# Altium PCB RN2483_carrier_board_pcb.PcbDoc
Units mm, origin at the board's own origin, x right, y up, seen from the top; angles counter-clockwise.
Board outline 29.21 x 43.94 mm, 2 copper layers (Top Layer, Bottom Layer); 5 components, 26 nets, 87 pads, 159 vias.
Unrouted connection lines stored in the file: 2.
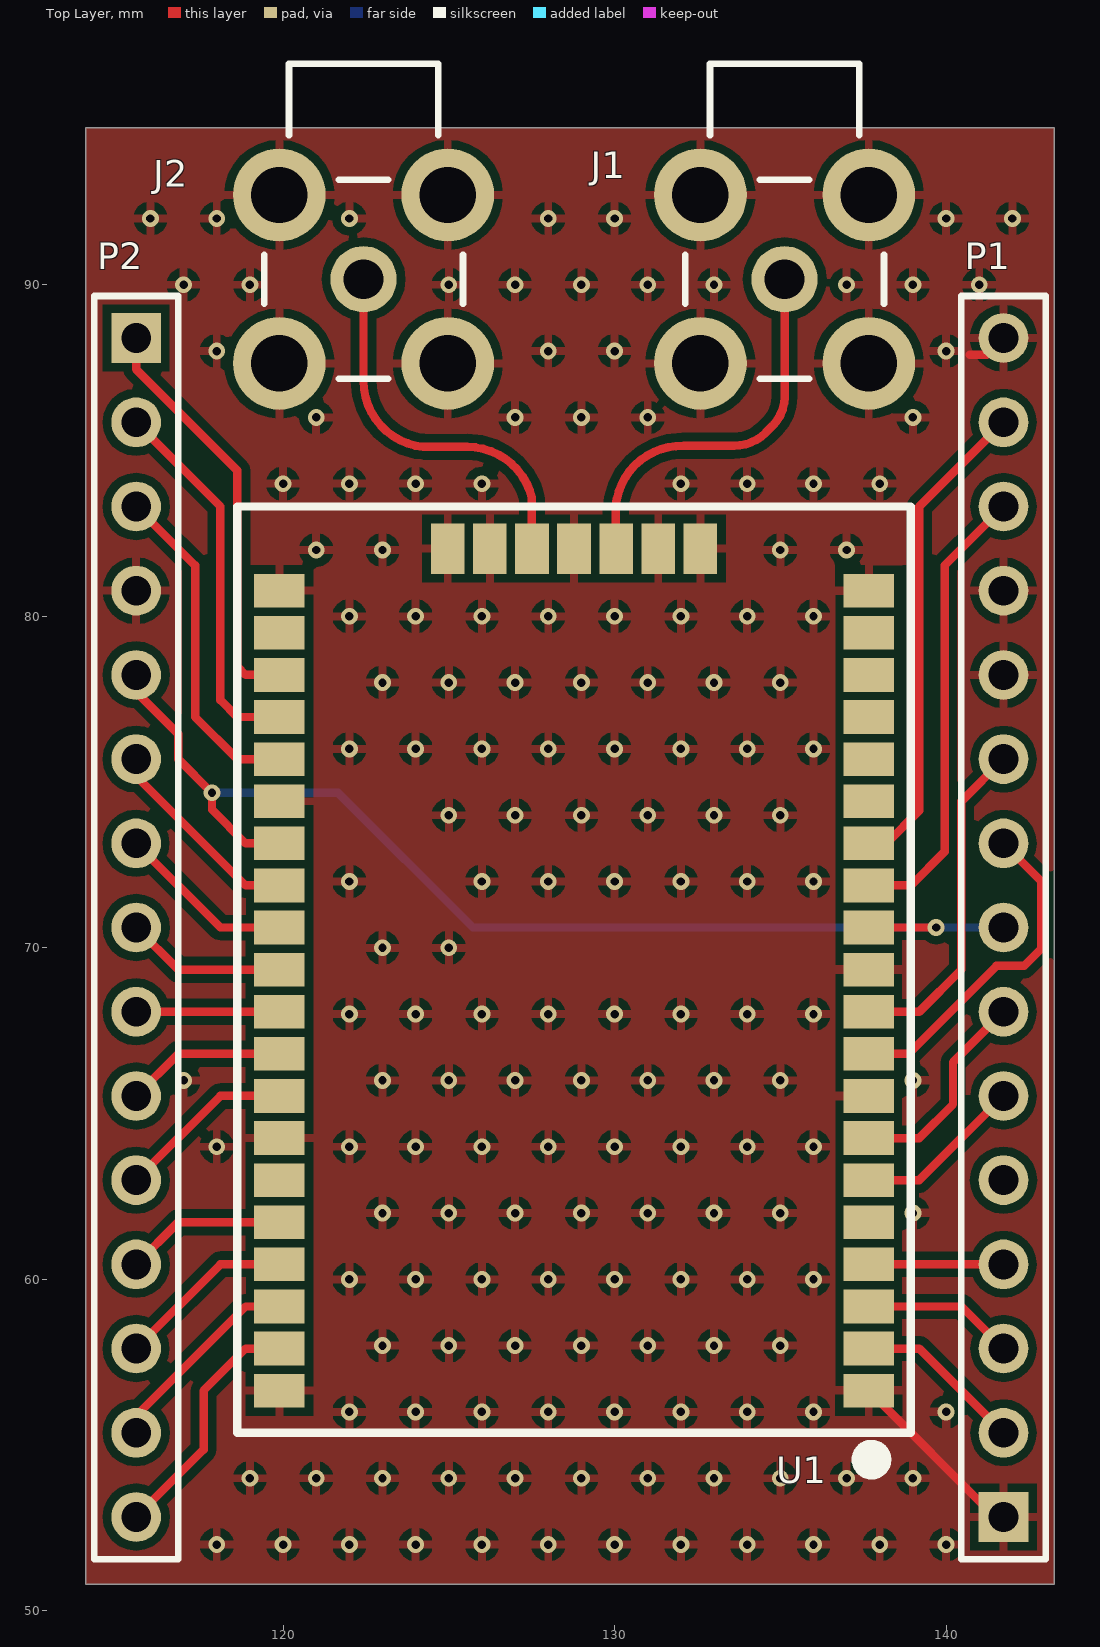
[diagram p0: Top Layer view]
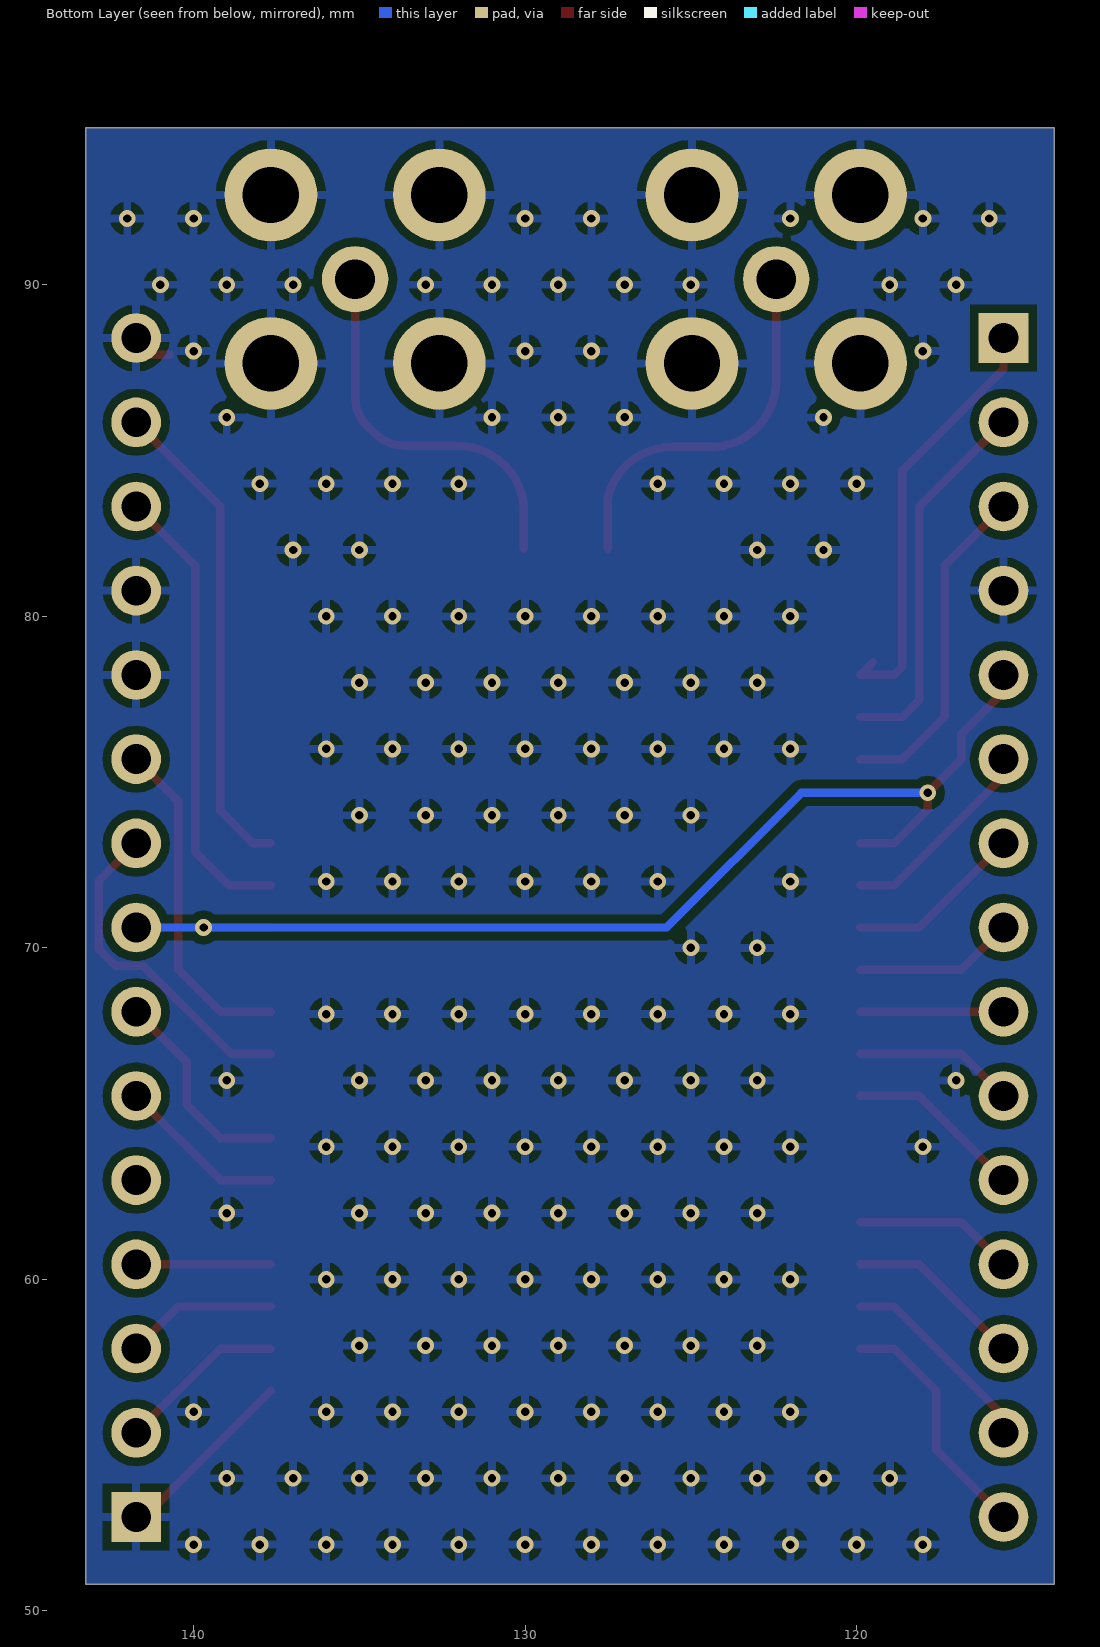
[diagram p1: Bottom Layer view, seen from below]

## Layer stack, top to bottom
Top Solder: solder mask 0.0102, Solder Resist, Dk 3.5
Top Layer: signal copper 0.0356
Dielectric 1: dielectric 0.32, FR-4, Dk 4.8
Bottom Layer: signal copper 0.0356
Bottom Solder: solder mask 0.0102, Solder Resist, Dk 3.5

## Board outline
114.046,50.8 143.256,50.8 143.256,94.742 114.046,94.742

## Design rules (kind name [scope] priority, off if disabled: settings)
Clearance [All] p1: gap=0.254
PolygonConnect [All] p1: connectstyle=Relief reliefconductorwidth=0.254 reliefentries=4 polygonreliefangle="90 Angle" airgapwidth=0.254
RoutingVias [All] p1: holewidth=0.254 width=0.508 viastyle="Through Hole" minholewidth=0.254 minwidth=0.508 maxholewidth=0.711 maxwidth=1.27
SolderMaskExpansion [All] p1: expansion=0.102 soldermaskfromhole=TRUE
Width [All] p1: maxlimit=0.254 minlimit=0.254 preferedwidth=0.254
30 further rules are at their usual default settings.

## Classes and differential pairs
component class RN2483: U1
component class Connectors: 434Mhz J1 P1 P2

## Components (designator, comment, footprint, x,y, rotation, side; value= is the part's Value field where it differs from the comment)
J1 "COAX-F" MCX5.08-H5 135.128,90.17 r270 top
J2 "COAX-F" MCX5.08-H5 122.428,90.17 r270 top
P1 "Header 15" HDR1X15 141.732,52.832 r90 top
P2 "Header 15" HDR1X15 115.57,88.392 r270 top
U1 "RN2483" RN2483 118.649,55.361 r0 top

## Footprints (in the part's own frame and the unit in brackets; to place one, negate y for a bottom-side part, rotate by r counter-clockwise, add the part's x,y. Pads: shape width x height; smd on the part's side, far side on the other; paste and mask are expansions set on the pad)
HDR1X15 [mm] "Connector; Header; 15 Position"
  rect 1.5x1.5 hole 0.9: 1(0,0)
  round 1.5 hole 0.9: 2(2.54,0) 3(5.08,0) 4(7.62,0) 5(10.16,0) 6(12.7,0) 7(15.24,0) 8(17.78,0) 9(20.32,0) 10(22.86,0) 11(25.4,0) 12(27.94,0) 13(30.48,0) 14(33.02,0) 15(35.56,0)
  silkscreen extent -1.27,-1.27 36.83,1.27
MCX5.08-H5 [mm] "Connector; RF Coaxial, MCX, Thru-Hole; 5 Position; Right-Angle"
  round 2 hole 1.2: 1(0,0)
  round 2.8 hole 1.7: 2(-2.54,-2.54) 3(2.54,-2.54) 4(2.54,2.54) 5(-2.54,2.54)
  silkscreen extent -6.5,-3 3,3
RN2483 [mil] "Low-Power Long Range LoRa® Technology  Transceiver Module"
  rect 60x40 smd: 1(748.78,50.43) 2(748.78,100.43) 3(748.78,150.43) 4(748.78,200.43) 5(748.78,250.43) 6(748.78,300.43) 7(748.78,350.43) 8(748.78,400.43) 9(748.78,450.43) 10(748.78,500.43) 11(748.78,550.43) 12(748.78,600.43) 13(748.78,650.43) 14(748.78,700.43) 15(748.78,750.43) 16(748.78,800.43) 17(748.78,850.43) 18(748.78,900.43) 19(748.78,950.43) 20(748.78,1000.43) 28(48.78,1000.43) 29(48.78,950.43) 30(48.78,900.43) 31(48.78,850.43) 32(48.78,800.43) 33(48.78,750.43) 34(48.78,700.43) 35(48.78,650.43) 36(48.78,600.43) 37(48.78,550.43) 38(48.78,500.43) 39(48.78,450.43) 40(48.78,400.43) 41(48.78,350.43) 42(48.78,300.43) 43(48.78,250.43) 44(48.78,200.43) 45(48.78,150.43) 46(48.78,100.43) 47(48.78,50.43)
  rect 40x60 smd: 21(548.78,1050.43) 22(498.78,1050.43) 23(448.78,1050.43) 24(398.78,1050.43) 25(348.78,1050.43) 26(298.78,1050.43) 27(248.78,1050.43)
  silkscreen extent -1,-43 799,1100

## Part data
J1 J2: "RF Coaxial PCB Connector, MCX; Thru-Hole, Right-Angle Mount Socket, Blunt Post Terminal, 50 Ohm Impedance"
P1 P2: "Header, 15-Pin"
U1: "Low-Power Long Range LoRa® Technology  Transceiver Module"

## Via types
v1: diameter 0.508, hole 0.254, Top Layer to Bottom Layer, 159 vias

## Nets (pads, with @x,y where several pads share a name; then routed paths per layer and width w, separated by ;. In a path a pad name is that pad's centre, name@x,y a point inside that pad or via, vN(x,y) a via of type N, cw(c..) or ccw(c..) an arc to the next point about the centre after c; other vN are vias at no path point)
+3V6: P1.8 P2.5 U1.12 U1.34 | length 35.1
  Top Layer w0.254: P2.5 115.57,77.724 116.84,76.454 116.84,75.692 v1(117.856,74.676) 117.856,74.168 118.872,73.152 U1.34 ; U1.12 v1(139.7,70.612)
  Bottom Layer w0.254: v1(117.856,74.676) 121.666,74.676 125.73,70.612 v1(139.7,70.612) P1.8
GND: J1.2 J1.3 J1.4 J1.5 J2.2 J2.3 J2.4 J2.5 P1.1 P1.11 P1.12 P1.15 P2.4 U1.1 U1.8 U1.11 U1.20 U1.21 U1.22 U1.24 U1.26 U1.27 U1.28 U1.33 U1.41 U1.47 | length 6.9
  Top Layer w0.254: U1.1 141.478,52.832 P1.1 ; 140.716,87.884 141.224,87.884 P1.15
  other v1: 118,52 120,52 122,52 124,52 126,52 128,52 130,52 132,52 134,52 136,52 138,52 140,52 119,54 121,54 123,54 125,54 127,54 129,54 131,54 133,54 135,54 137,54 139,54 122,56 124,56 126,56 128,56 130,56 132,56 134,56 136,56 140,56 123,58 125,58 127,58 129,58 131,58 133,58 135,58 122,60 124,60 126,60 128,60 130,60 132,60 134,60 136,60 123,62 125,62 127,62 129,62 131,62 133,62 135,62 139,62 118,64 122,64 124,64 126,64 128,64 130,64 132,64 134,64 136,64 117,66 123,66 125,66 127,66 129,66 131,66 133,66 135,66 139,66 122,68 124,68 126,68 128,68 130,68 132,68 134,68 136,68 123,70 125,70 122,72 126,72 128,72 130,72 132,72 134,72 136,72 125,74 127,74 129,74 131,74 133,74 135,74 122,76 124,76 126,76 128,76 130,76 132,76 134,76 136,76 123,78 125,78 127,78 129,78 131,78 133,78 135,78 122,80 124,80 126,80 128,80 130,80 132,80 134,80 136,80 121,82 123,82 135,82 137,82 120,84 122,84 124,84 126,84 132,84 134,84 136,84 138,84 121,86 127,86 129,86 131,86 139,86 118,88 128,88 130,88 140,88 117,90 119,90 125,90 127,90 129,90 131,90 133,90 137,90 139,90 141,90 116,92 118,92 122,92 128,92 130,92 140,92 142,92
NetJ1_1: J1.1 U1.23 | length 11.7
  Top Layer w0.254: U1.23 130.037,82.053 130.037,83.313 cw(c132.03,83.143) 132.081,85.142 133.604,85.142 ccw(c133.604,86.496) 134.561,85.539 134.769,85.747 ccw(c133.902,86.614) 135.128,86.614 J1.1
NetJ2_1: J2.1 U1.25 | length 11.8
  Top Layer w0.254: J2.1@122.428,90.424 J2.1 122.428,87.099 ccw(c124.428,87.099) 124.235,85.108 125.561,85.108 cw(c125.561,83.108) 127.508,83.566 U1.25
NetP1_2: P1.2 U1.2 | length 5.1
  Top Layer w0.254: U1.2 139.192,57.912 P1.2
NetP1_3: P1.3 U1.3 | length 4.6
  Top Layer w0.254: U1.3 140.462,59.182 P1.3
NetP1_4: P1.4 P1.5 U1.4 U1.5 | length 4.1
  Top Layer w0.254: U1.4 P1.4
NetP1_6: P1.6 U1.6 | length 5.1
  Top Layer w0.254: U1.6 139.192,62.992 P1.6
NetP1_7: P1.7 U1.7 | length 6.4
  Top Layer w0.254: U1.7 139.192,64.262 140.208,65.278 140.208,66.548 P1.7
NetP1_9: P1.9 U1.9 | length 10.2
  Top Layer w0.254: U1.9 138.863,66.802 141.518,69.457 142.355,69.457 142.863,69.965 142.863,72.021 P1.9
NetP1_10: P1.10 U1.10 | length 10.2
  Top Layer w0.254: U1.10 139.192,68.072 140.462,69.342 140.462,74.422 P1.10
NetP1_13: P1.13 U1.13 | length 13.9
  Top Layer w0.254: U1.13 138.938,71.882 139.954,72.898 139.954,81.534 P1.13
NetP1_14: P1.14 U1.14 | length 14.7
  Top Layer w0.254: U1.14 138.207,73.152 139.192,74.137 139.192,83.312 P1.14
NetP2_1: P2.1 U1.30 | length 13.1
  Top Layer w0.254: P2.1 115.57,87.451 118.618,84.403 118.618,78.486 118.872,78.232 U1.30 U1.30@119.507,78.613
NetP2_2: P2.2 U1.31 | length 11.4
  Top Layer w0.254: P2.2 118.11,83.312 118.11,77.47 118.618,76.962 U1.31
NetP2_3: P2.3 U1.32 | length 10.2
  Top Layer w0.254: P2.3 117.348,81.534 117.348,76.962 118.618,75.692 U1.32
NetP2_6: P2.6 U1.35 | length 6.2
  Top Layer w0.254: P2.6 115.57,75.184 118.872,71.882 U1.35
NetP2_7: P2.7 U1.36 | length 5.4
  Top Layer w0.254: P2.7 118.11,70.612 U1.36
NetP2_8: P2.8 U1.37 | length 4.8
  Top Layer w0.254: P2.8 116.84,69.342 U1.37
NetP2_9: P2.9 U1.38 | length 4.3
  Top Layer w0.254: P2.9 U1.38
NetP2_10: P2.10 U1.39 | length 4.8
  Top Layer w0.254: P2.10 116.84,66.802 U1.39
NetP2_11: P2.11 U1.40 | length 5.4
  Top Layer w0.254: P2.11 118.11,65.532 U1.40
NetP2_12: P2.12 U1.43 | length 4.8
  Top Layer w0.254: P2.12 116.84,61.722 U1.43
NetP2_13: P2.13 U1.44 | length 5.4
  Top Layer w0.254: P2.13 118.11,60.452 U1.44
NetP2_14: P2.14 U1.45 | length 6.2
  Top Layer w0.254: P2.14 115.57,55.88 118.872,59.182 U1.45
NetP2_15: P2.15 U1.46 | length 7.5
  Top Layer w0.254: P2.15 117.602,54.864 117.602,56.642 118.872,57.912 U1.46
pads on no net: U1.15 U1.16 U1.17 U1.18 U1.19 U1.29 U1.42

## Polygon pours and split planes (outlines as drawn)
GND on Top Layer "Top Layer-No Net" (solid, pour order 2): 114.046,94.742 114.046,50.8 143.256,50.8 143.256,94.742
GND on Bottom Layer "Top Layer-No Net" (solid, pour order 4): 114.046,94.742 114.046,50.8 143.256,50.8 143.256,94.742

## Silkscreen, mask and mechanical layers (free items; w line width, h text height)
Mechanical 1:
  the board outline again, w0.254